# Altium PCB alarm_module.PcbDoc
Units mm, origin at the board's own origin, x right, y up, seen from the top; angles counter-clockwise.
Board outline 100 x 70 mm, 2 copper layers (Top Layer, Bottom Layer), stack 1.173 mm thick; 67 components, 56 nets, 251 pads, 98 vias.
Unrouted connection lines stored in the file: 1.
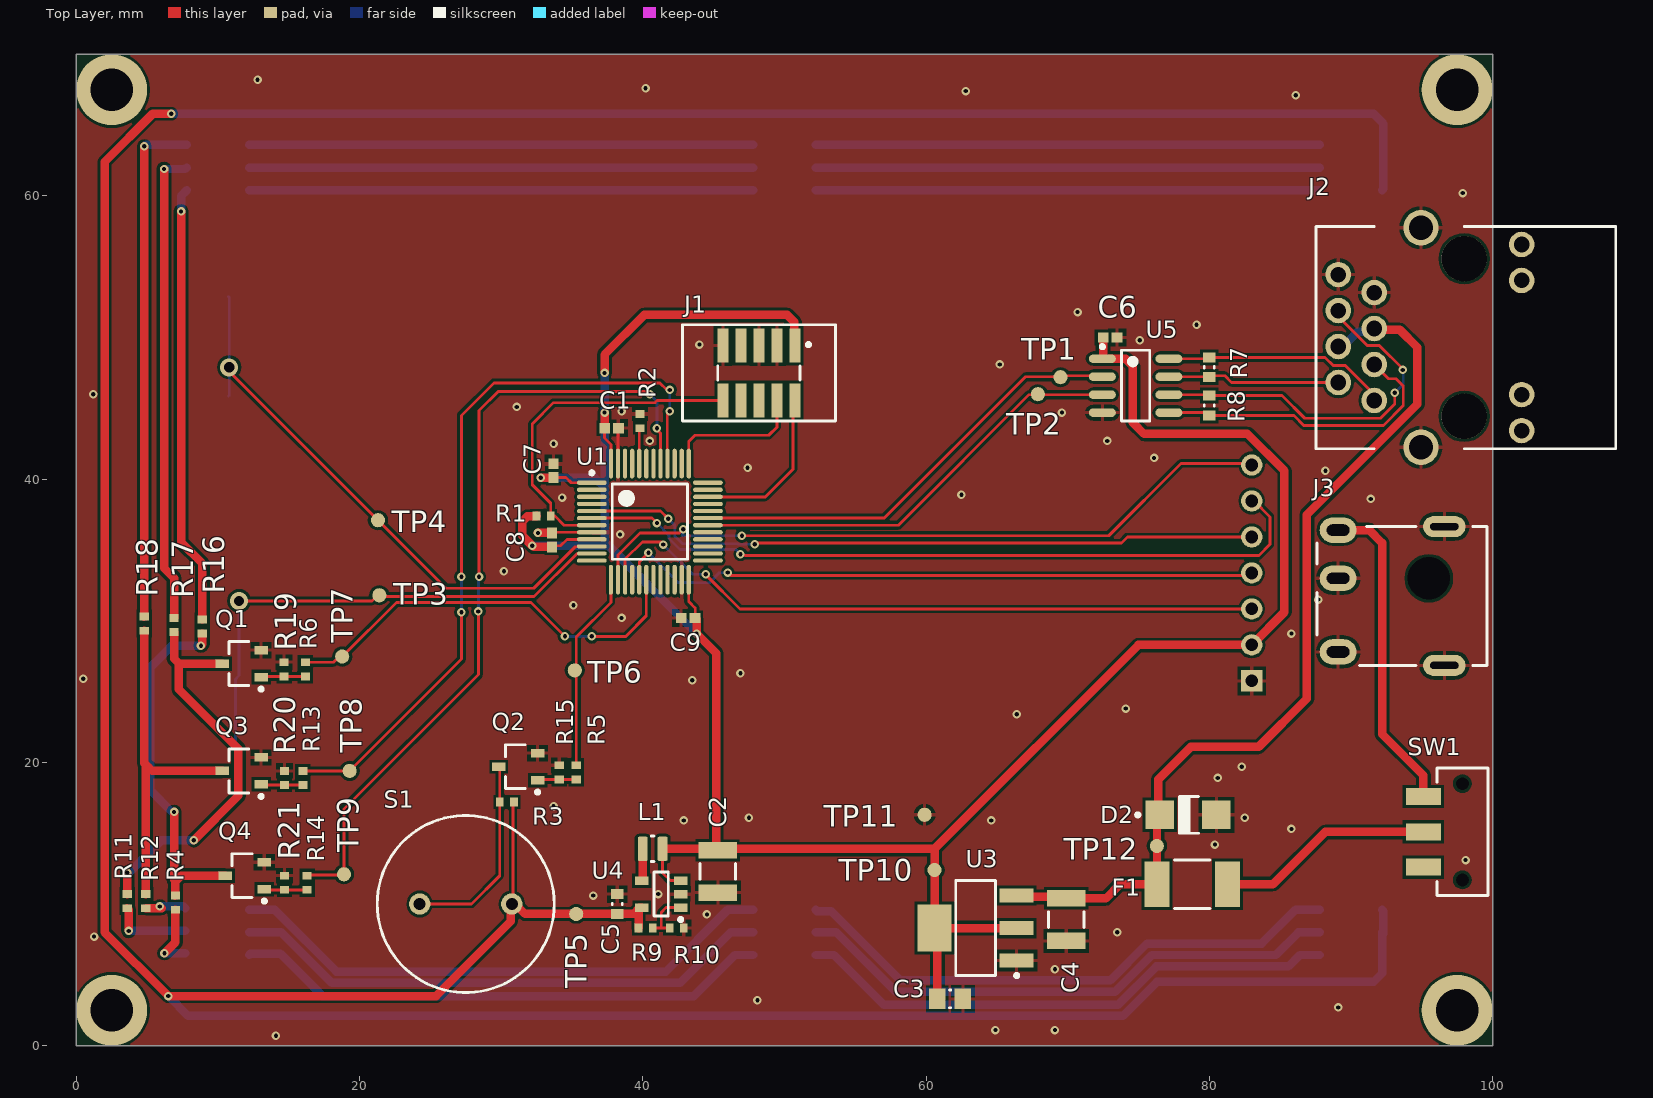
[diagram p0: Top Layer view]
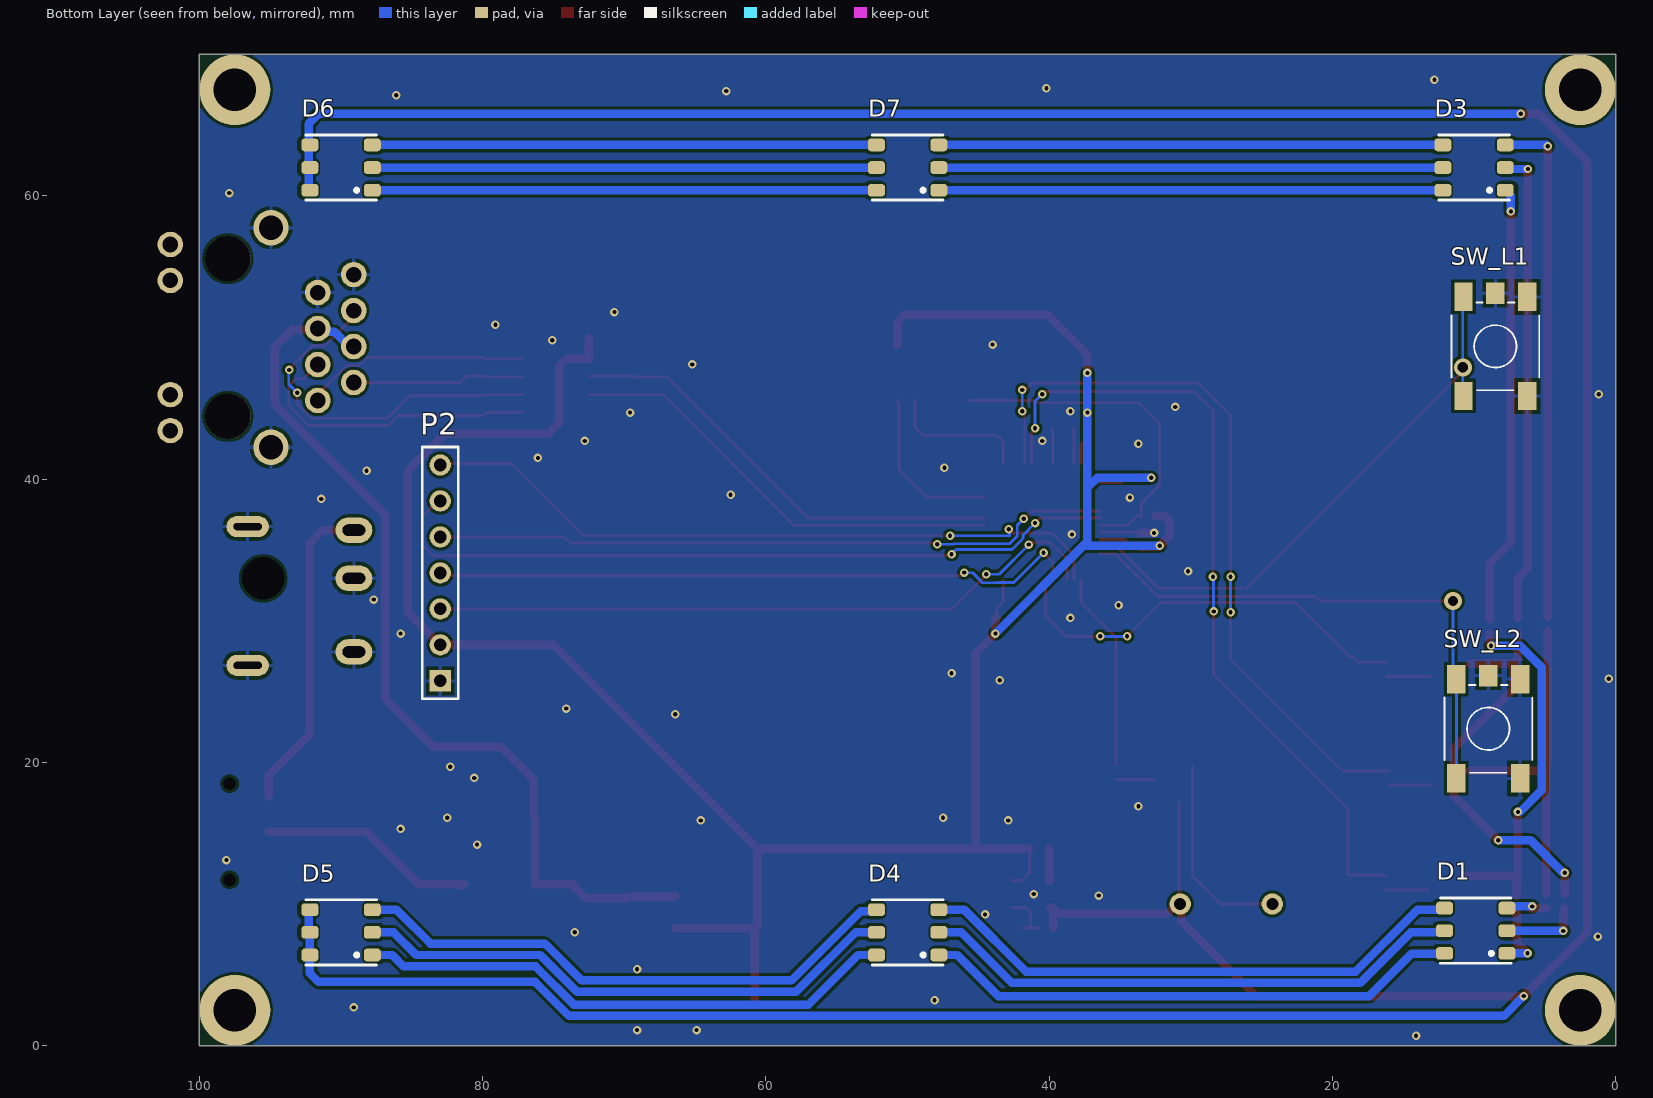
[diagram p1: Bottom Layer view, seen from below]
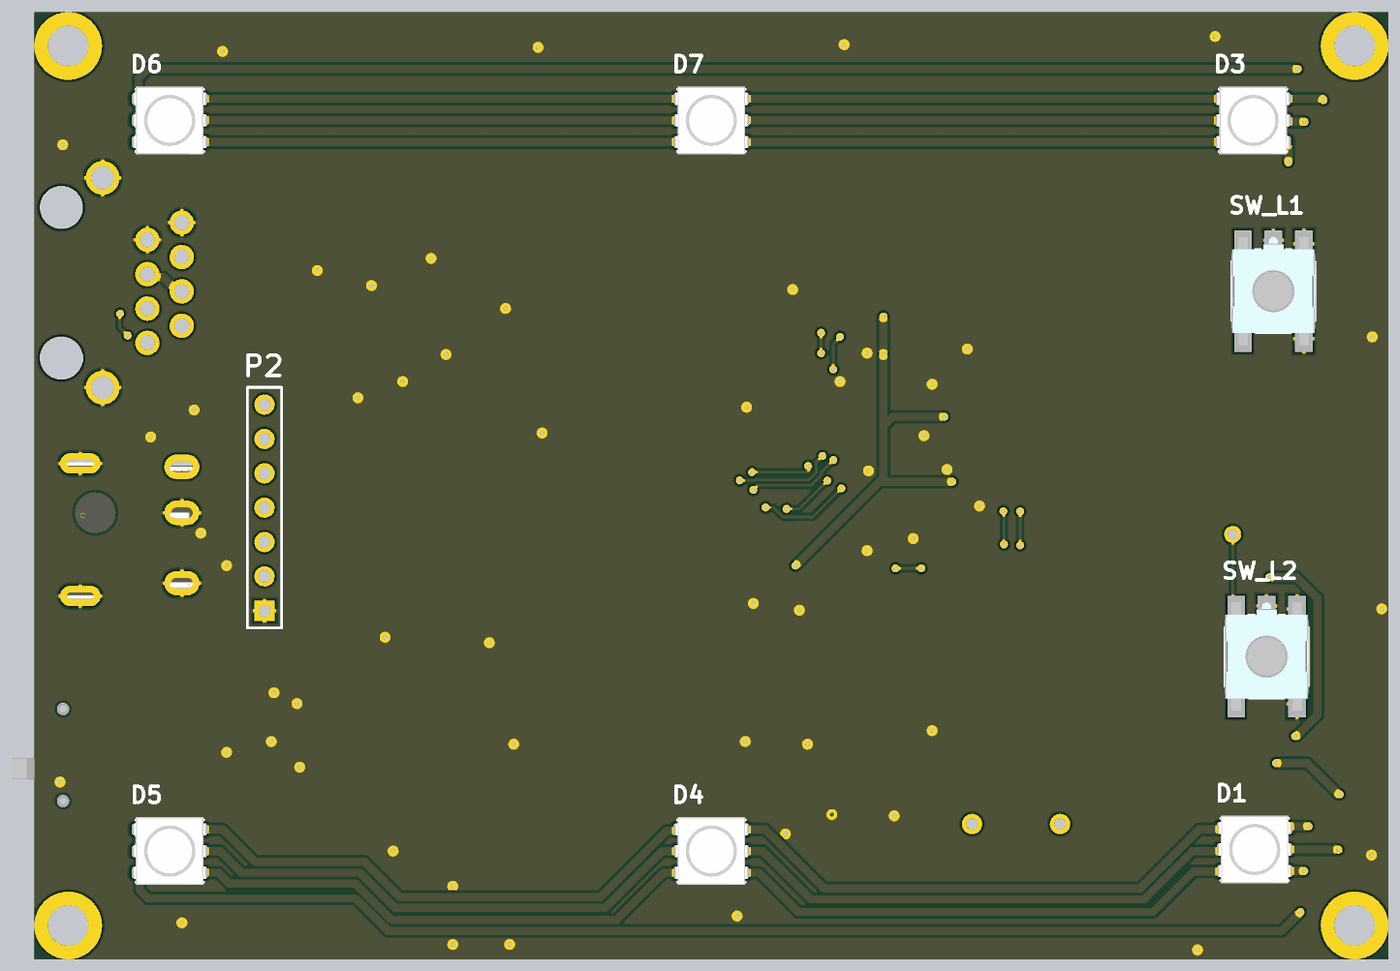
[diagram p2: 3D render of the assembled board from below, using the file's embedded part models]

## Layer stack, top to bottom
Top Solder: solder mask 0.0127, Solder Resist, Dk 3.8
Top Layer: signal copper 0.0356
Dielectric 1: dielectric 1.102, FR-4, Dk 4.8
Bottom Layer: signal copper 0.0356
Bottom Solder: solder mask 0.0127, Solder Resist, Dk 3.8

## Board outline
0,0 0,70 100,70 100,0

## Design rules (kind name [scope] priority, off if disabled: settings)
Clearance [All] p1: gap=0.2 ignorepadtopadclearanceinfootprint=FALSE
PolygonConnect [All] p1: thpad.connectstyle=Relief thpad.reliefconductorwidth=0.254 thpad.reliefentries=4 thpad.polygonreliefangle="90 Angle" thpad.airgapwidth=0.254 smdpad.connectstyle=Relief smdpad.reliefconductorwidth=0.254 smdpad.reliefentries=4 smdpad.polygonreliefangle="90 Angle" smdpad.airgapwidth=0.254 via.connectstyle=Direct via.reliefconductorwidth=0.254 via.reliefentries=4 via.polygonreliefangle="90 Angle" via.airgapwidth=0.254
RoomDefinition alarm_module [InComponentClass('alarm_module')] p1: confinementstyle=ConfineIn formatcopy=TRUE lockcomponents=FALSE outline 0,70 107,70 107,0 0,0
RoomDefinition power [InComponentClass('power')] p2: confinementstyle=ConfineIn formatcopy=TRUE lockcomponents=FALSE outline 57,32 100,32 100,-4 57,-4
RoutingVias [All] p1: holewidth=0.711 width=1.27 viastyle="Through Hole" minholewidth=0.3 minwidth=0.6 maxholewidth=0.711 maxwidth=1.27
SolderMaskExpansion SolderMaskExpansion_1 [IsVia] p1: expansion=-99 istentingtop=FALSE
SolderMaskExpansion [All] p2: expansion=0.102 istentingtop=FALSE
Width [All] p1: maxlimit=0.6 minlimit=0.2 preferedwidth=0.4
30 further rules are at their usual default settings.

## Classes and differential pairs
component class power: C3 C4 D2 F1 J3 SW1 TP10 TP11 TP12 U3
component class alarm_module: C1 C2 C5 C6 C7 C8 C9 D1 D3 D4 D5 D6 D7 J1 J2 L1 P2 Q1 Q2 Q3 Q4 R1 R2 R3 R4 R5 R6 R7 R8 R9 R10 R11 R12 R13 R14 R15 R16 R17 R18 R19 R20 R21 S1 SW_L1 SW_L2 TP1 TP2 TP3 TP4 TP5 TP6 TP7 TP8 TP9 U1 U4 U5

## Components (designator, comment, footprint, x,y, rotation, side; value= is the part's Value field where it differs from the comment)
C1 "GRM155R71C104KA88D" CAPC1005X55X25ML05T10 37.8,43.6 r180 top
C2 "CAP 10uF 50V 1210(3225)" CAPC1210(3225)190_N 45.3,12.3 r90 top value=10uF
C3 "CAP 10uF 10V 0805(2012)" CAPC0805(2012)145_N 61.7,3.3 r180 top value=10uF
C4 "CAP 10uF 50V 1210(3225)" CAPC1210(3225)190_N 69.9,8.9 r90 top value=10uF
C5 "CAP 4.7uF 10V 0603(1608)" CAPC0603(1608)55_L 38.2,10 r270 top value=4.7uF
C6 "GRM155R71C104KA88D" CAPC1005X55X25ML05T10 73,50 r180 top
C7 "GRM155R71C104KA88D" CAPC1005X55X25ML05T10 33.7,40.6 r270 top
C8 "GRM155R71C104KA88D" CAPC1005X55X25ML05T10 33.6,35.7 r270 top
C9 "GRM155R71C104KA88D" CAPC1005X55X25ML05T10 43.2,30.2 r0 top
D1 "RBG5050" 5050RGB 9.883,8.117 r0 bottom
D2 "MURA110T3G" ONSC-SMA-2-403D-02_V 78.5,16.3 r0 top
D3 "RBG5050" 5050RGB 10,62 r0 bottom
D4 "RBG5050" 5050RGB 50,8 r0 bottom
D5 "RBG5050" 5050RGB 90,8 r0 bottom
D6 "RBG5050" 5050RGB 90,62 r0 bottom
D7 "RBG5050" 5050RGB 50,62 r0 bottom
F1 "mSMD110-33V" SEAANDLAND_1812 78.8,11.4 r180 top
J1 "ARM Cortex JTAG" "1.27mm 2x5 SMD Header" 48.2,47.5 r180 top
J2 "RJ45_59_8P8C_LED" RJ45_59_8P8C_LED 98,50 r90 top
J3 "DC-044A-2.5A-2.0" DC-044A-2.5A-2.0 99.6,33 r270 top
L1 "FNR201610S2R2MT" FNR201610S 40.7,13.9 r180 top
P2 "Header 7" HDR1X7 83,25.76 r90 bottom
Q1 "AO3418" SOT95P280X125-3N 11.675,26.975 r180 top
Q2 "AO3418" SOT95P280X125-3N 31.2,19.7 r180 top
Q3 "AO3418" SOT95P280X125-3N 11.675,19.4 r180 top
Q4 "AO3418" SOT95P280X125-3N 11.9,12 r180 top
R1 "10K 5% 0402(1005)" RESC0402(1005)_N 33,37.4 r0 top value="10000.00 Ohm"
R2 "10K 5% 0402(1005)" RESC0402(1005)_N 39.8,44.1 r90 top value="10000.00 Ohm"
R3 "1K 5%" RESC0402(1005)_N 30.4,17.2 r0 top value="10000.00 Ohm"
R4 "TBD" RESC0402(1005)_N 7,10.1 r270 top value="10000.00 Ohm"
R5 "51 5%" RESC0402(1005)_N 35.3,19.3 r270 top value="10000.00 Ohm"
R6 "TBD" RESC0402(1005)_N 16.175,26.575 r270 top value="10000.00 Ohm"
R7 "120R 5% 0603(1608)" RESC0603(1608)_L 80,47.9 r90 top value="120.00 Ohm"
R8 "120R 5% 0603(1608)" RESC0603(1608)_L 80,45.2 r270 top value="120.00 Ohm"
R9 "TBD" RESC0402(1005)_N 40.2,8.3 r180 top value="10000.00 Ohm"
R10 "TBD" RESC0402(1005)_N 42.4,8.3 r180 top value="10000.00 Ohm"
R11 "TBD" RESC0402(1005)_N 3.6,10.2 r270 top value="10000.00 Ohm"
R12 "TBD" RESC0402(1005)_N 4.9,10.2 r270 top value="10000.00 Ohm"
R13 "TBD" RESC0402(1005)_N 16,18.9 r270 top value="10000.00 Ohm"
R14 "TBD" RESC0402(1005)_N 16.3,11.5 r270 top value="10000.00 Ohm"
R15 "10k 5%" RESC0402(1005)_N 34.1,19.3 r270 top value="10000.00 Ohm"
R16 "TBD" RESC0402(1005)_N 8.9,29.6 r90 top value="10000.00 Ohm"
R17 "TBD" RESC0402(1005)_N 6.9,29.7 r90 top value="10000.00 Ohm"
R18 "TBD" RESC0402(1005)_N 4.8,29.8 r90 top value="10000.00 Ohm"
R19 "10k 5%" RESC0402(1005)_N 14.675,26.575 r270 top value="10000.00 Ohm"
R20 "10k 5%" RESC0402(1005)_N 14.7,18.9 r270 top value="10000.00 Ohm"
R21 "10k 5%" RESC0402(1005)_N 14.7,11.5 r270 top value="10000.00 Ohm"
S1 "SFN-1255-0540-35P6.5" SFN-1255-0540-35P6.5 27.5,10 r180 top
SW1 "JS102011SAQN" CKCP-JS102011SAQN-3_V 96.5,15.1 r90 top
SW_L1 "431481031816" 431481031816 8.5,49.5 r270 bottom
SW_L2 "431481031816" 431481031816 9,22.5 r270 bottom
TP1 "TEST_POINT" TP-SMD-1mm 69.5,47.2 r270 top
TP2 "TEST_POINT" TP-SMD-1mm 67.9,46 r270 top
TP3 "TEST_POINT" TP-SMD-1mm 21.4,31.8 r270 top
TP4 "TEST_POINT" TP-SMD-1mm 21.3,37.1 r270 top
TP5 "TEST_POINT" TP-SMD-1mm 35.3,9.3 r270 top
TP6 "TEST_POINT" TP-SMD-1mm 35.2,26.5 r270 top
TP7 "TEST_POINT" TP-SMD-1mm 18.775,27.475 r0 top
TP8 "TEST_POINT" TP-SMD-1mm 19.3,19.4 r270 top
TP9 "TEST_POINT" TP-SMD-1mm 18.9,12.1 r270 top
TP10 "TEST_POINT" TP-SMD-1mm 60.6,12.4 r270 top
TP11 "TEST_POINT" TP-SMD-1mm 59.9,16.3 r270 top
TP12 "TEST_POINT" TP-SMD-1mm 76.3,14.1 r270 top
U1 "STM32F030C8T6" STM-LQFP48_M 40.5,37 r0 top
U3 "LD1117S33CTR" SOT-223_N 63.5,8.3 r180 top
U4 "BL8542C" SOT95P280X130-5N 41.3,10.7 r180 top
U5 "ADM3488ARZ" ADI-R-8_L 74.8,46.6 r0 top

## Footprints (in the part's own frame and the unit in brackets; to place one, negate y for a bottom-side part, rotate by r counter-clockwise, add the part's x,y. Pads: shape width x height; smd on the part's side, far side on the other; paste and mask are expansions set on the pad)
"1.27mm 2x5 SMD Header" [mm]
  rect 0.76x2.4 smd: 1(-2.54,-1.95) 2(-2.54,1.95) 3(-1.27,-1.95) 4(-1.27,1.95) 5(0,-1.95) 6(0,1.95) 7(1.27,-1.95) 8(1.27,1.95) 9(2.54,-1.95) 10(2.54,1.95)
  silkscreen extent -5.4,-3.4 5.4,3.4, body extent -3.15,-2.75 3.2,2.75, height 4.5
5050RGB [mm]
  rrect50% 1.2x0.9 smd: 1(-2.2,1.6) 2(-2.2,0) 3(-2.2,-1.6) 4(2.2,-1.6) 5(2.2,0) 6(2.2,1.6)
  silkscreen extent -2.5,-2.3 2.5,2.3, body extent -2.7,-2.5 2.7,2.5, height 1.6
431481031816 [mm] "6*6mm vertical type, SMD, height 3.1mm, black actuator, 160gf, Grounded Terminal, T&R"
  rect 2x1.3 smd: 1(3.625,-2.25) 2(-3.375,-2.25) 3(3.625,2.25) 4(-3.375,2.25)
  rect 1.5x1.3 smd: 5(-3.625,0)
  silkscreen extent -2.98,-3.1 3.22,3.1, body extent -3.88,-3.1 4.12,3.1, height 3.09
ADI-R-8_L [mm] "SOIC, 8-Leads, Body 5x4mm, Pitch 1.27mm, IPC High Density"
  oval 1.9x0.6 smd: 1(-2.35,1.905) 2(-2.35,0.635) 3(-2.35,-0.635) 4(-2.35,-1.905) 5(2.35,-1.905) 6(2.35,-0.635) 7(2.35,0.635) 8(2.35,1.905)
  silkscreen extent -2.47,-2.5 1,2.88, body extent -2,-2.5 2,2.5, height 1.75
CAPC0603(1608)55_L [mm] "Chip Capacitor, Body 1.6x0.8mm, Height 0.55mm, IPC High Density"
  rect 0.7x0.9 smd: 1(-0.7,0) 2(0.7,0)
  silkscreen extent -0.05,-0.35 0.05,0.35, body extent -0.87,-0.47 0.88,0.48, height 0.55
CAPC0805(2012)145_N [mm] "Chip Capacitor, Body 2.0x1.2mm, Height 1.45mm, IPC Medium Density"
  rect 1.15x1.45 smd: 1(-0.9,0) 2(0.9,0)
  silkscreen extent -0.05,-0.62 0.05,0.63, body extent -1.1,-0.72 1.1,0.73, height 1.45
CAPC1005X55X25ML05T10 [mm] "Chip Capacitor, 2-Leads, Body 1.00x0.50mm, IPC Low Density"
  rect 0.76x0.72 smd: 1(-0.49,0) 2(0.49,0)
  body extent -0.53,-0.28 0.53,0.27, height 0.55
CAPC1210(3225)190_N [mm] "Chip Capacitor, Body 3.2x2.5mm, Height 1.9mm, IPC Medium Density"
  rect 1.15x2.7 smd: 1(-1.5,0) 2(1.5,0)
  silkscreen extent -0.55,-1.25 0.55,1.25, body extent -1.7,-1.35 1.7,1.35, height 1.9
CKCP-JS102011SAQN-3_V [mm] "SMD, 3-Leads, Body 9x3.6mm, Pitch 2.5mm"
  rect 1.2x2.5 smd: 1(-2.5,1.375) 2(0,1.375) 3(2.5,1.375)
  round 0.6 hole 0.9 unplated: MH1(-3.4,-1.375) MH2(3.4,-1.375)
  silkscreen extent -4.5,-3.17 4.5,0.43, body extent -4.5,-5.18 4.5,2.37, height 3.52
DC-044A-2.5A-2.0 [mm] "DC Jack, 6mm OD, 2mm ID"
  rrect100% 1.8x2.6 hole 0.8 slot 1.6 at 90 deg: 1(-3.4,-10.5) 2(5.2,-10.5) 3(0,-10.5)
  rrect100% 1.5x3 hole 0.5 slot 2 at 90 deg: 4(-3.65,-3) 5(6.15,-3)
  rrect100% 2x2 hole 3 unplated: MNT(0,-4.1)
  silkscreen extent -3.65,-12 6.15,0, body extent -3.75,-11.75 6.35,0, height 7.3
FNR201610S [mm] "Wire Wound SMD Power Inductors 2.0×1.6×1.0"
  rrect25% 0.7x1.7 smd paste+0: 1(-0.7,0) 2(0.7,0)
  silkscreen extent -0.1,-0.9 0.1,0.9, body extent -1,-0.8 1,0.8, height 0.95
HDR1X7 [mm] "Connector; Header; 7 Position"
  rect 1.5x1.5 hole 0.9: 1(0,0)
  round 1.5 hole 0.9: 2(2.54,0) 3(5.08,0) 4(7.62,0) 5(10.16,0) 6(12.7,0) 7(15.24,0)
  silkscreen extent -1.27,-1.27 16.51,1.27
ONSC-SMA-2-403D-02_V [mm] "Molded, 2-Leads, Body 4.57x2.92mm"
  rect 2x2 smd: 1(-2,0) 2(2,0)
  silkscreen extent -3.67,-1.3 0.74,1.3, body extent -2.16,-1.3 2.16,1.3, height 2.2
RESC0402(1005)_N [mm] "Chip Resistor, Body 1.0x0.5mm, IPC Medium Density"
  rect 0.55x0.65 smd: 1(-0.5,0) 2(0.5,0)
  body extent -0.52,-0.27 0.53,0.28, height 0.4
RESC0603(1608)_L [mm] "Chip Resistor, Body 1.6x0.8mm, IPC High Density"
  rect 0.7x0.9 smd: 1(-0.7,0) 2(0.7,0)
  silkscreen extent -0.05,-0.35 0.05,0.35, body extent -0.85,-0.47 0.85,0.47, height 0.6
RJ45_59_8P8C_LED [mm] "Generic RJ49 jack with LED and without magnetics"
  round 1.8 hole 1.1: 1(-4.445,6.35) 2(-3.175,8.89) 3(-1.905,6.35) 4(-0.635,8.89) 5(0.635,6.35) 6(1.905,8.89) 7(3.175,6.35) 8(4.445,8.89) 9(-6.57,-4.06) 10(-4.03,-4.06) 11(4.03,-4.06) 12(6.57,-4.06)
  round 3.2 hole 3.2 unplated: POS1(-5.565,0) POS2(5.565,0)
  round 2.5 hole 1.7: S1(-7.75,3.05) S2(7.75,3.05)
  silkscreen extent -7.85,-10.7 7.85,10.46, body extent -7.85,-10.58 7.85,10.58, height 13.45
SEAANDLAND_1812 [mm] "Surface Mount Fuses 1812"
  rrect0% 1.78x3.2 smd paste+0: 1(-2.49,0) 2(2.49,0)
  silkscreen extent -1.25,-1.71 1.25,1.71, body extent 0,-0.25 0.2,0, height 2
SFN-1255-0540-35P6.5 [mm] "Piezo Buzzer, 4KHz"
  round 1.5 hole 0.85: 1(-3.25,0) 2(3.25,0)
  silkscreen extent -6.25,-6.25 6.25,6.25, body extent -6.25,-6.25 6.25,6.25, height 5.5
SOT95P280X125-3N [mm] "SOT23, 3-Leads, Body 2.95x2.80mm, Pitch 0.95mm, IPC Medium Density"
  rect 0.95x0.6 smd: 1(-1.375,0.95) 2(-1.375,-0.95) 3(1.375,0)
  silkscreen extent -1.5,-1.55 0.9,1.92, body extent -1.5,-1.55 1.5,1.55, height 1.25
SOT95P280X130-5N [mm] "SOT23, 5-Leads, Body 2.90x2.80mm, Pitch 0.95mm, IPC Medium Density"
  rect 0.95x0.6 smd: 1(-1.375,0.95) 2(-1.375,0) 3(-1.375,-0.95) 4(1.375,-0.95) 5(1.375,0.95)
  silkscreen extent -1.5,-1.55 0.5,1.92, body extent -1.5,-1.55 1.5,1.55, height 1.3
SOT-223_N [mm] "SOT223, 4-Leads, Body 6.5x3.5mm, Pitch 2.3mm, Lead Span 7mm, IPC Medium Density"
  rect 2.4x1 smd: 1(-2.9,2.3) 2(-2.9,0) 3(-2.9,-2.3)
  rect 2.4x3.3 smd: 4(2.9,0)
  silkscreen extent -3.03,-3.35 1.4,3.47, body extent -1.85,-3.35 1.85,3.35, height 1.8
STM-LQFP48_M [mm] "QFP, 48-Leads, Body 7x7mm, Pitch 0.5mm, IPC Low Density"
  oval 2.1x0.3 smd: 1(-4.1,2.75) 2(-4.1,2.25) 3(-4.1,1.75) 4(-4.1,1.25) 5(-4.1,0.75) 6(-4.1,0.25) 7(-4.1,-0.25) 8(-4.1,-0.75) 9(-4.1,-1.25) 10(-4.1,-1.75) 11(-4.1,-2.25) 12(-4.1,-2.75) 25(4.1,-2.75) 26(4.1,-2.25) 27(4.1,-1.75) 28(4.1,-1.25) 29(4.1,-0.75) 30(4.1,-0.25) 31(4.1,0.25) 32(4.1,0.75) 33(4.1,1.25) 34(4.1,1.75) 35(4.1,2.25) 36(4.1,2.75)
  oval 0.3x2.1 smd: 13(-2.75,-4.1) 14(-2.25,-4.1) 15(-1.75,-4.1) 16(-1.25,-4.1) 17(-0.75,-4.1) 18(-0.25,-4.1) 19(0.25,-4.1) 20(0.75,-4.1) 21(1.25,-4.1) 22(1.75,-4.1) 23(2.25,-4.1) 24(2.75,-4.1) 37(2.75,4.1) 38(2.25,4.1) 39(1.75,4.1) 40(1.25,4.1) 41(0.75,4.1) 42(0.25,4.1) 43(-0.25,4.1) 44(-0.75,4.1) 45(-1.25,4.1) 46(-1.75,4.1) 47(-2.25,4.1) 48(-2.75,4.1)
  silkscreen extent -4.22,-2.65 2.65,3.57, body extent -3.5,-3.5 3.5,3.5, height 1.6
TP-SMD-1mm [mm] "Test point, round, 1mm, SMD"
  round 1 smd paste-999: 1(0,0)

## Part data
C1 C6 C7 C8 C9: library part CMP-2100-03641-1, "Chip Capacitor, 0.1 uF, +/- 10%, 16 V, -55 to 125 degC, 0402 (1005 Metric), RoHS, Tape and Reel", Capacitance=100nF, Case Code (Imperial)=0402, Case Code (Metric)=1005, Dielectric=X7R, Dielectric Material=Ceramic, Insulation Resistance=10GR, Manufacturer=Murata, Max Operating Temperature=125degC, Min Operating Temperature=-55degC, Package Description="2-Pin Surface Mount Device, Body 1 x 0.5 mm", Package Quantity=1, Tolerance=10%, Voltage=16V, Case/Package=0402, Datasheet URL=http://psearch.en.murata.com/capacitor/product/GRM155R71C104KA88%23.pdf, Datasheet Version=42675.0, Depth=0.5mm, Height=0.5mm, Lead Free=LeadFree, Length=1mm, Manufacturer URL=http://www.murata.com/, Material=Ceramic, Mount=SurfaceMount, Number of Pins=2, Package Reference=0402, Packaging=TapeandReel, Radiation Hardening=No, REACH SVHC=NoSVHC, RoHSCompliant=true, Termination=SMD/SMT, Thickness=0.022inch, Voltage Rating=16V, Voltage Rating (DC)=16V, Width=0.5mm
C2 C4: library part CMP-1038-02238-1, "CAP 10uF 50V -20% to +80% 1210 (3225 Metric) Thickness 1.9mm SMD", Case-EIA=1210, Case-Metric=3225, Rated Voltage="50 V", Tolerance="-20% to +80%", Max Thickness="1.9 mm", Technology=SMT
C3: library part CMP-1036-04922-1, "CAP 10uF 10V ±10% 0805 (2012 Metric) Thickness 1.45mm SMD", Case-EIA=0805, Case-Metric=2012, Rated Voltage="10 V", Tolerance=Â±10%, Max Thickness="1.45 mm", Technology=SMT
C5: library part CMP-1035-02784-1, "CAP 4.7uF 10V ±10% 0603 (1608 Metric) Thickness 0.55mm SMD", Case-EIA=0603, Case-Metric=1608, Rated Voltage="10 V", Tolerance=Â±10%, Max Thickness="0.55 mm", Technology=SMT
D1 D3 D4 D5 D6 D7: "Generic RGB LED in 5050 package. Note that several variants exist, so check the pinout!", Manufacturer=Unknown/Generic, PartNumber=Unknown/Generic
D2: library part CMP-0902-00293-1, "Surface Mount Ultrafast Power Rectifier, 2-Pin SMA, Pb-Free, Tape and Reel", Manufacturer="On Semiconductor", ComponentLink1Description="Manufacturer URL", ComponentLink1URL=http://www.onsemi.com/, ComponentLink2Description=Datasheet, ComponentLink2URL=http://www.onsemi.cn/pub_link/Collateral/MURA105T3-D.PDF, ComponentLink3Description="Package Specification", ComponentLink3URL=http://www.onsemi.com/pub_link/Collateral/403D-02.PDF, DatasheetVersion="Rev. 5", IFSM Max (A)=50, Mounting Technology="Surface Mount", PackageDescription="2-Pin Small Molded Package, J-Bend Lead, Body 2.605 x 4.315 mm", PackageReference=SMA-2-403D-02, PackageVersion="Rev. G, 07/2012", Packing="Tape and Reel", PartNumber=MURA110T3G, RoHS=TRUE, Type=Ultrafast
F1: "Surface Mount Fuses 33V 100A 1.1A 2.2A 1812 RoHS", Manufacturer="Sea & Land Electronic Corp", ComponentLink2Description=Datasheet, ComponentLink2URL="nSMD020-30V 0-2A-30V-Self-healing-fuse_C69680.pdf", PartNumber=mSMD110-33V
J1: "Arm Cortex 10-pin JTAG connector", Manufacturer=Unknown/Generic, PartNumber=unknown/Generic
J2: "Generic RJ49 jack with LED and without magnetics", Manufacturer=Unknown/Generic, PartNumber=RJ45_59_8P8C_LED
J3: "DC Jack, 6mm OD, 2mm ID", Manufacturer=XKB, PartNumber=DC-044A-2.5A-2.0
L1: "Wire Wound SMD Power Inductors 2.0×1.6×1.0 2.2uH"
P2: "Header, 7-Pin", LatestRevisionDate=17-Jul-2002, LatestRevisionNote="Re-released for DXP Platform.", Publisher="Altium Limited"
Q1 Q2 Q3 Q4: "30V N-Channel MOSFET", Manufacturer="Alpha & Omega", ComponentLink1Description=datasheet, ComponentLink1URL=ao3418.pdf, PartNumber=AO3418
R1 R2 R3 R4 R5 R6 R9 R10 R11 R12 R13 R14 R15 R16 R17 R18 R19 R20 R21: library part CMP-1011-00098-1, "10K 0.063W 5% 0402 (1005 Metric)  SMD", Case-EIA=0402, Case-Metric=1005, Power="0.063 W", Tolerance="5 %", Technology=SMT
R7 R8: library part CMP-1012-00052-1, "120R 0.1W 5% 0603 (1608 Metric)  SMD", Case-EIA=0603, Case-Metric=1608, Power="0.1 W", Tolerance="5 %", Technology=SMT
S1: "Piezo Buzzer, 4KHz", Manufacturer=S&S, PartNumber=SFN-1255-0540-35P6.5
SW1: library part CMP-2000-06501-1, "Sub-Miniature Slide Switch, SPDT, -40 to 85 degC, 3-Pin SMD, RoHS, Tape and Reel", Actuator Color=Black, Contact Rating @ Voltage=0.3@6VDCA, Dielectric Strength=500VAC, Manufacturer="C&K Components", Maximum AC Voltage Rating=N/A, Maximum Contact Resistance=70mOhm, Maximum DC Voltage Rating=6V, Minimum Insulation Resistance=100MOhm, Operating Temperature=-40to85C, Package Description="3-Pin Surface Mount Device, Body 9 x 3.6 mm, Height 3.5 mm", Package Reference=SMT, Actuator Material=Nylon4/6, Actuator Style=SideSlide, Base Material=N/A, Body Orientation=RightAngle, Contact Material=CopperAlloy, Contact Plating=Silver, COO=US, Datasheet URL=https://datasheet.ciiva.com/1532/js-9dec14-1532400.pdf, Datasheet Version=12/2014, Dimension=9x4.3mm, ECCN=EAR99, Electrical Life=15000Cycles, Family=JS, Housing Material=Nylon4/6, HTS=8536509050, Manufacturer URL=http://www.ckswitches.com/, Mechanical Life=N/A, Mounting=SurfaceMount,GullWing, Mounting Technology=SurfaceMount, Packaging=TapeandReel, Part No=JS102011SAQN, Pole Throw Configuration=SPDT, Product Weight=N/A, RoHS=Yes, Seal Description=N/A, Seal Location=N/A, Supplier=C&KComponents, Switch Configuration=N/A, Type=Sub-Miniature
SW_L1 SW_L2: library part CMP-1457-00011-1, "WS-TASV SMD Tact Switch 6X6 mm with ground terminal", Manufacturer="Wuerth Elektronik", ComponentLink1Description="Manufacturer URL", ComponentLink1URL=http://www.we-online.com, ComponentLink2Description=Datasheet, ComponentLink2URL=http://katalog.we-online.de/em/datasheet/431481031816.pdf, NoPins=04, PackageReference=431481031816, PartNumber=431481031816
TP1 TP2 TP3 TP4 TP5 TP6 TP7 TP8 TP9 TP10 TP11 TP12: "Test point"
U1: library part CMP-0304-00024-2, "ARM Cortex-M0 32-bit MCU, 64 KB Flash, 8 KB Internal RAM, 39 I/Os, 48-pin LQFP, -40 to 85 degC, Tray", I/Os (High Current)=39, Operating Frequency(F) (Processor speed) (MHz)=48, Supply Voltage(Vcc) min (V)=2.4, ComponentLink1Description="Manufacturer URL", ComponentLink1URL=http://www.st.com/web/en/home.html, ComponentLink2Description=Datasheet, ComponentLink2URL=http://www.st.com/st-web-ui/static/active/en/resource/technical/document/datasheet/DM00088500.pdf, ComponentLink3Description="Package Specification", ComponentLink3URL=http://www.st.com/st-web-ui/static/active/en/resource/technical/document/datasheet/DM00058181.pdf, Core="ARM Cortex-M0", DatasheetVersion="Rev. 1", FLASH Size (Prog) (kB)=64, Internal RAM Size (kB)=8, Mounting Technology="Surface Mount", PackageDescription="48-Pin Low Profile Quad Flat Package, 7 x 7 mm Body, 0.5 mm Pitch", PackageReference=LQFP48, PackageVersion="Rev. 6, 06/2013", Packing=Tray, PartNumber=STM32F030C8T6
U3: library part CMP-0244-00307-1, "Fixed Low Drop Positive Voltage Regulator, 3.3V, 4-Pin SOT-223, Tape and Reel", ComponentLink1Description="Manufacturer URL", ComponentLink1URL=http://www.st.com, ComponentLink2Description=Datasheet, ComponentLink2URL=http://www.st.com/internet/com/TECHNICAL_RESOURCES/TECHNICAL_LITERATURE/DATASHEET/CD00000544.pdf, DatasheetVersion=1/11/2011, PackageDescription="4-Pin SOT-223 Package, 6.5 x 3.5 mm Body, 2.3 mm Pitch, 7 mm Lead Span", PackageReference=SOT-223, PackageVersion=2010
U4: "0.85V startup, 1MHz, 300mA Iout,  Synchronous Boost Converter (adjustable output)", Manufacturer=Belling, PartNumber=BL8542C
U5: library part CMP-0535-00058-1, "3.3 V Slew Rate Limited, Full-Duplex, RS-485/RS-422 Transceivers, 3 to 3.6 V, -40 to 85 degC, 8-Pin SOIC (R-8), RoHS, Tube", Manufacturer="Analog Devices", Supply Voltage="3 to 3.6 V", Temperature Range="-40 to 85 degC", ComponentLink1Description="Manufacturer URL", ComponentLink1URL=http://www.analog.com/en/index.html, ComponentLink2Description=Datasheet, ComponentLink2URL=http://www.analog.com/static/imported-files/data_sheets/ADM3483_3485_3488_3490_3491.pdf, ComponentLink3Description="Package Specification", ComponentLink3URL=http://www.analog.com/media/en/package-pcb-resources/package/pkg_pdf/soic_narrow-r/r_8.pdf, DatasheetVersion="Rev. E", Duplex=Full, Guaranteed Data Rate="0.25 Mbps", Mounting Technology="Surface Mount", Number of Drivers=1, PackageDescription="8-Pin Standard Small Outline Package, Body 4.9 x 3.9 mm, Pitch 1.27 mm", PackageVersion=06/2006, Packing=Tube, PartNumber=ADM3488ARZ, Receiver Hysteresis="50 mV", RoHS=TRUE

## Free pads (board coordinates)
  round 5 hole 3 unplated: MP1(2.5,2.5) MP2(2.5,67.5) MP3(97.5,67.5) MP4(97.5,2.5)

## Via types
v1: diameter 0.6, hole 0.3, Top Layer to Bottom Layer, 96 vias
v2: diameter 1.27, hole 0.711, Top Layer to Bottom Layer, 2 vias

## Nets (pads, with @x,y where several pads share a name; then routed paths per layer and width w, separated by ;. In a path a pad name is that pad's centre, name@x,y a point inside that pad or via, vN(x,y) a via of type N, cw(c..) or ccw(c..) an arc to the next point about the centre after c; other vN are vias at no path point)
+3.3V: C1.2 C2.2 C3.2 C6.2 C7.2 C8.2 C9.2 J1.1 L1.1 P2.2 R1.1 TP10.1 U1.1 U1.9 U1.24 U1.48 U3.2 U3.4 U4.3 U5.1 | length 184.5
  Top Layer w0.2: C8.2 33.69,35.3 34.2,35.3 34.65,35.75 U1.9 ; C7.2 34.59,40.11 34.95,39.75 U1.1 ; C1.2 37.3,43.59 37.3,42.9 37.75,42.45 U1.48 ; L1.1 41.4,12.2 41.95,11.65 U4.3 ; U1.24 43.25,31.35 43.7,30.9 43.7,30.21 C9.2
  Top Layer w0.6: R1.1 32.475,37.375 31.851,37.375 31.5,37.024 31.5,36 v1(32.2,35.3) 32.29,35.21 C8.2 ; v1(32.8,40.1) 33.69,40.1 C7.2 ; v1(37.3,44.7) 37.3,43.61 C1.2 ; v1(37.3,47.5) 37.3,48.8 40.1,51.6 50.2,51.6 50.7,51.1 50.7,49.49 J1.1 ; L1.1 C2.2@45.2,13.9 ; C9.2 43.71,30.2 43.77,30.14 43.77,30.12 43.8,30.09 v1(43.8,29.1) 45.2,27.7 C2.2@45.2,13.9 ; C3.2 60.8,8.1 U3.4 ; U3.2 U3.4 ; U5.1 U5.1@72.51,48.505 ; C6.2 U5.1@72.51,48.505 ; C2.2@45.2,13.9 60.6,13.9 ; U3.4 TP10.1 60.6,13.9 ; 60.6,13.9 75,28.3 P2.2 85.3,30.6 85.3,40.6 82.7,43.2 75.4,43.2 74.6,44 74.6,48 74.095,48.505 U5.1@72.51,48.505
  Bottom Layer w0.6: v1(32.2,35.3) 37.6,35.3 ; v1(32.8,40.1) 36.6,40.1 37.3,39.4 ; v1(37.3,47.5) v1(37.3,44.7) 37.3,39.4 ; v1(43.8,29.1) 37.6,35.3 ; 37.3,39.4 37.3,35.6 37.6,35.3
+12V: C4.2 D2.1 F1.2 J2.4 J2.5 TP12.1 U3.3 | length 65.4
  Top Layer w0.6: U3.3 66.5,10.5 69.8,10.5 C4.2 72.698,10.4 73.698,11.4 F1.2 76.31,14.1 76.31,16.11 76.4,16.2 76.4,18.8 78.7,21.1 83.5,21.1 86.9,24.5 86.9,37.5 94.7,45.3 94.7,49.3 93.45,50.55 91.735,50.55 J2.5
  Bottom Layer w0.6: J2.4 89.435,49.365 90.475,50.405 91.42,50.405 J2.5
+12V_IN: F1.1 SW1.2 | length 15.5
  Top Layer w0.6: F1.1@81.41,11.28 F1.1 84.5,11.4 88.2,15.1 SW1.2
\R\S\T: J1.10 R1.2 U1.7 | length 24.4
  Top Layer w0.2: U1.7 34.45,36.75 33.8,37.4 R1.2 33.5,38.3 32.2,39.6 32.2,43.9 33.7,45.4 40.866,45.4 41.016,45.55 J1.10
BOOT0: R2.1 U1.44 | length 2.5
  Top Layer w0.2: U1.44 39.75,43.55 R2.1
BUT_CAL: SW_L1.1 SW_L1.2 TP4.1 U1.10 | length 40.5
  Top Layer w0.2: v2(10.8,47.9) 10.8,47.6 TP4.1 26.1,32.3 32.3,32.3 35.231,35.231 36.381,35.231 U1.10
  Bottom Layer w0.2: SW_L1.1 10.8,45.925 v2(10.8,47.9) 10.8,52.825 SW_L1.2
BUT_SELECT: SW_L2.1 SW_L2.2 TP3.1 U1.11 | length 38.9
  Top Layer w0.2: v2(11.5,31.4) 20.883,31.4 21.2,31.717 32.331,31.717 35.344,34.731 36.381,34.731 U1.11
  Bottom Layer w0.2: SW_L2.1 SW_L2.2 11.5,26.125 v2(11.5,31.4)
DRIVE_B: Q4.3 R4.1 R16.1 | length 25.7
  Top Layer w0.6: v1(6.9,16.5) 6.9,11.7 7,11.6 ; R4.1 7,11.6 ; v1(8.8,28.238) 8.9,28.338 R16.1 ; Q4.3 7.4,12 7,11.6
  Bottom Layer w0.6: v1(6.9,16.5) 6.768,16.5 5.238,18.03 5.238,26.72 6.756,28.238 v1(8.8,28.238)
DRIVE_G: Q3.3 R12.1 R18.1 | length 24.2
  Top Layer w0.6: R18.1 4.8,19.951 5.1,19.651 5.351,19.4 Q3.3 ; R12.1 4.9,19.851
DRIVE_R: Q1.3 R11.1 R17.1 | length 28.1
  Top Layer w0.6: R11.1 v1(3.6,12.2) ; R17.1 6.9,27.326 7.251,26.975 ; v1(8.3,14.5) 11.451,17.651 11.451,20.949 7.251,25.149 7.251,26.975 ; Q1.3 7.251,26.975
  Bottom Layer w0.6: v1(3.6,12.2) 3.7,12.2 6,14.5 v1(8.3,14.5)
GND: C1.1 C2.1 C3.1 C4.1 C5.1 C6.1 C7.1 C8.1 C9.1 D2.2 J1.3 J1.5 J1.9 J2.7 J2.8 J2.S1 J2.S2 J3.2 J3.3 J3.4 J3.5 P2.1 Q1.2 Q2.2 Q3.2 Q4.2 R2.2 R10.1 R15.1 R19.1 R20.1 R21.1 SW_L1.3 SW_L1.4 SW_L1.5 SW_L2.3 SW_L2.4 SW_L2.5 TP11.1 U1.8 U1.23 U1.47 U3.1 U4.2 U5.4 | length 6.3
  Top Layer w0.2: C8.1 33.66,36.25 U1.8 ; U1.47 38.25,43.56 C1.1
  Top Layer w0.6: v1(32.6,36.2) 33.59,36.2 C8.1
  other v1: 14.1,0.7 64.9,1.1 69.1,1.1 89.1,2.7 48.1,3.2 69.1,5.4 1.257,7.703 73.5,8 44.534,9.266 36.5,10.6 41.1,10.7 98.1,13.1 80.4,14.2 85.8,15.3 42.9,15.9 64.6,15.9 47.5,16.1 82.5,16.1 33.7,16.9 80.6,18.9 82.3,19.7 66.4,23.4 74.1,23.8 43.5,25.8 0.5,25.9 46.9,26.3 85.8,29.1 38.5,30.2 35.1,31.1 87.7,31.5 96.4,32.8 30.2,33.5 38.4,36.1 91.4,38.6 34.3,38.7 62.5,38.9 88.2,40.6 47.4,40.8 76.1,41.5 33.7,42.5 40.5,42.7 72.8,42.7 69.6,44.7 38.5,44.8 31.1,45.1 1.2,46 65.2,48.1 44,49.5 75.1,49.8 79.1,50.9 70.7,51.8 97.9,60.2 86.1,67.1 62.8,67.4 40.2,67.6 12.8,68.2
LED_B: R14.1 TP9.1 U1.41 | length 57.3
  Top Layer w0.2: R14.1 16.35,12.05 18.85,12.05 TP9.1 18.9,16.708 28.4,26.208 28.4,30.654 v1(28.392,30.662) ; v1(28.436,33.108) 28.436,44.836 29.8,46.2 40.3,46.2 v1(40.5,46) ; v1(41,43.6) 41,43.492 41.25,43.242 U1.41
  Bottom Layer w0.2: v1(28.392,30.662) 28.4,30.671 28.4,33.1 28.408,33.108 v1(28.436,33.108) ; v1(40.5,46) 41,45.5 v1(41,43.6)
LED_G: R13.1 TP8.1 U1.40 | length 52.8
  Top Layer w0.2: R13.1 TP8.1 27.2,27.3 27.2,29.3 v1(27.2,30.6) ; v1(27.2,33.1) 27.2,44.5 29.5,46.8 41.2,46.8 41.7,46.3 v1(41.9,46.3) ; U1.40 41.731,41.119 41.731,44.631 v1(41.9,44.8)
  Bottom Layer w0.2: v1(27.2,30.6) v1(27.2,33.1) ; v1(41.9,44.8) v1(41.9,46.3)
LED_R: R6.1 TP7.1 U1.18 | length 30
  Top Layer w0.2: R6.1 18.159,27.075 18.559,27.475 TP7.1 22.6,31.3 32.1,31.3 v1(34.5,28.9) ; v1(36.4,28.9) 38.8,28.9 40.25,30.35 U1.18
  Bottom Layer w0.2: v1(34.5,28.9) v1(36.4,28.9)
NetD1_1: D1.1 R4.2 | length 4.9
  Top Layer w0.6: v1(6.222,6.527) 6.222,6.522 7,7.3 R4.2
  Bottom Layer w0.6: v1(6.222,6.527) 7.673,6.527 D1.1
NetD1_2: D1.2 R11.2 | length 5.6
  Top Layer w0.6: R11.2 3.625,9.675 3.7,9.6 v1(3.7,8.1)
  Bottom Layer w0.6: v1(3.7,8.1) 3.717,8.117 D1.2
NetD1_3: D1.3 R12.2 | length 3
  Top Layer w0.6: R12.2 6,9.7 v1@6.017,9.717
  Bottom Layer w0.6: v1(5.9,9.833) 7.567,9.833 D1.3
NetD1_4: D1.4 D4.3 | length 39.2
  Bottom Layer w0.6: D1.4@12.2,9.6 14,9.6 18.366,5.234 41.634,5.234 46,9.6 D4.3
NetD1_5: D1.5 D4.2 | length 38.6
  Bottom Layer w0.6: D1.5@12.2,8 14.469,8 18.034,4.434 42.634,4.434 46.2,8 D4.2
NetD1_6: D1.6 D4.1 | length 38.1
  Bottom Layer w0.6: D1.6@12.2,6.4 12.3,6.5 14.4,6.5 17.4,3.5 43.6,3.5 46.5,6.4 D4.1
NetD3_1: D3.1 R16.2 | length 31.1
  Top Layer w0.6: v1(7.4,58.9) 7.4,35.547 8.9,34.047 R16.2
  Bottom Layer w0.6: v1(7.4,58.9) 7.4,60 D3.1
NetD3_2: D3.2 R17.2 | length 33.6
  Top Layer w0.6: v1(6.2,61.9) 6.2,33.719 6.9,33.019 R17.2
  Bottom Layer w0.6: v1(6.2,61.9) 7.7,61.9 D3.2
NetD3_3: D3.3 R18.2 | length 36.2
  Top Layer w0.6: R18.2 v1(4.8,63.5)
  Bottom Layer w0.6: v1(4.8,63.5) 4.9,63.6 D3.3
NetD3_4: D3.4 D7.3 | length 35.6
  Bottom Layer w0.6: D3.4 D7.3
NetD3_5: D3.5 D7.2 | length 35.6
  Bottom Layer w0.6: D3.5 D7.2
NetD3_6: D3.6 D7.1 | length 35.6
  Bottom Layer w0.6: D3.6 D7.1
NetD4_4: D4.4 D5.3 | length 39.7
  Bottom Layer w0.6: D4.4 52.3,9.5 53.3,9.5 58.2,4.6 73.006,4.6 75.606,7.2 83.7,7.2 86.1,9.6 D5.3
NetD4_5: D4.5 D5.2 | length 39.1
  Bottom Layer w0.6: D4.5 53.669,8 57.869,3.8 73.337,3.8 75.937,6.4 84.7,6.4 86.3,8 D5.2
NetD4_6: D4.6 D5.1 | length 38.5
  Bottom Layer w0.6: D4.6 53.5,6.4 57,2.9 73.569,2.9 76.269,5.6 85.59,5.6 86.39,6.4 D5.1
NetD6_1: D6.1 D7.6 | length 35.6
  Bottom Layer w0.6: D7.6 D6.1
NetD6_2: D6.2 D7.5 | length 35.6
  Bottom Layer w0.6: D7.5 D6.2
NetD6_3: D6.3 D7.4 | length 35.6
  Bottom Layer w0.6: D7.4 D6.3
NetJ3_1: J3.1 SW1.3 | length 22.6
  Top Layer w0.6: J3.1 91.3,36.4 92.2,35.5 92.2,22 95.125,19.075 SW1.3
NetL1_2: L1.2 U4.4 | length 2.3
  Top Layer w0.6: U4.4 40,11.65 L1.2
NetQ1_1: Q1.1 R6.2 R19.2 | length 3.1
  Top Layer w0.2: Q1.1 13.1,26.075 R19.2 R6.2
NetQ2_1: Q2.1 R5.2 R15.2 | length 2.7
  Top Layer w0.2: Q2.1 32.625,18.8 R15.2 R5.2
NetQ2_3: Q2.3 R3.1 S1.2 | length 14.2
  Top Layer w0.2: S1.2 27.9,10 29.9,12 R3.1 29.9,19.625 Q2.3
NetQ3_1: Q3.1 R13.2 R20.2 | length 3
  Top Layer w0.2: Q3.1 13.1,18.4 R20.2 R13.2
NetQ4_1: Q4.1 R14.2 R21.2 | length 3
  Top Layer w0.2: Q4.1 13.325,11 R21.2 R14.2
OLED_D/C: P2.6 U1.6 | length 53.2
  Top Layer w0.2: U1.6 40.65,37.25 v1(41,36.9) ; v1(46.9,34.7) 46.977,34.623 47.194,34.623 47.217,34.6 83.5,34.6 84.3,35.4 84.3,37.336 83.176,38.46 P2.6
  Bottom Layer w0.2: v1(41,36.9) 41.857,36.043 41.857,35.812 42.635,35.034 46.566,35.034 v1(46.9,34.7)
OLED_RST: P2.5 U1.5 | length 48.2
  Top Layer w0.2: U1.5 41.25,37.75 v1(41.8,37.2) ; v1(47.9,35.4) 48,35.5 73.8,35.5 74.22,35.92 P2.5
  Bottom Layer w0.2: v1(41.8,37.2) 42.257,36.743 42.257,35.977 42.801,35.434 46.732,35.434 46.766,35.4 v1(47.9,35.4)
PIEZO: R5.1 TP6.1 U1.13 | length 14.1
  Top Layer w0.2: R5.1 35.3,28.85 37.75,31.3 U1.13
SENSOR_RX+: J2.3 R8.2 U5.5 | length 21.6
  Top Layer w0.2: U5.5 79.805,44.695 R8.2 85.975,44.5 86.675,43.8 92.3,43.8 93.7,45.2 93.7,46.583 93.197,47.086 92.659,47.086 J2.3
SENSOR_RX-: J2.6 R8.1 U5.6 | length 26.4
  Top Layer w0.2: U5.6 79.935,45.965 R8.1 85.141,45.9 86.741,44.3 92.092,44.3 93.1,45.308 v1(93.1,46.1) ; J2.6 89.11,51.478 91.153,49.435 92.007,49.435 93.668,47.774 v1(93.668,47.715)
  Bottom Layer w0.2: v1(93.1,46.1) 93.7,46.7 93.7,47.747 v1(93.668,47.715)
SENSOR_TX+: J2.1 R7.2 U5.8 | length 16.1
  Top Layer w0.2: U5.8 79.905,48.505 R7.2 88.178,48.6 88.753,48.025 89.607,48.025 91.65,45.982 J2.1
SENSOR_TX-: J2.2 R7.1 U5.7 | length 12.2
  Top Layer w0.2: U5.7 79.965,47.235 80.03,47.3 81.1,47.3 81.575,46.825 J2.2
SPI1_MISO: U1.16
SPI1_MOSI: P2.4 U1.17 | length 46.1
  Top Layer w0.2: U1.17 39.75,34.157 40.393,34.8 v1(40.4,34.8) ; v1(46,33.4) 46.2,33.2 82.82,33.2 P2.4
  Bottom Layer w0.2: v1(40.4,34.8) 42.5,32.7 43.6,32.7 43.61,32.69 44.7,32.69 45.4,33.39 45.99,33.39 v1(46,33.4)
SPI1_NSS: P2.7 U1.14 | length 49.9
  Top Layer w0.2: U1.14 38.25,34.65 39.8,36.2 42.6,36.2 v1(42.857,36.457) ; v1(47,36) 72.9,36 78,41.1 82.9,41.1 P2.7
  Bottom Layer w0.2: v1(42.857,36.457) 42.8,36.4 42.8,36 v1(47,36)
SPI1_SCK: P2.3 U1.15 | length 48.2
  Top Layer w0.2: U1.15 38.75,34.35 39.971,35.571 41.321,35.571 41.438,35.454 v1(41.438,35.382) ; v1(44.452,33.29) 44.452,33.248 46.86,30.84 P2.3
  Bottom Layer w0.2: v1(41.438,35.382) 43.53,33.29 v1(44.452,33.29)
SWCLK: J1.4 U1.37 | length 10.1
  Top Layer w0.2: U1.37 43.25,42.65 43.7,43.1 48.9,43.1 49.47,43.67 J1.4
SWDIO: J1.2 U1.34 | length 11.7
  Top Layer w0.2: U1.34 48.65,38.75 50.6,40.7 50.6,45.41 J1.2
USART1_RX: TP1.1 U1.31 U5.2 | length 32.1
  Top Layer w0.2: U1.31 57.05,37.25 67.035,47.235 TP1.1@69.3,47.235 ; TP1.1@69.3,47.2 69.4,47.3 72.385,47.3 U5.2
USART1_TX: TP2.1 U1.30 U5.3 | length 31.7
  Top Layer w0.2: U1.30 58.05,36.75 67.265,45.965 U5.3
VFB: R9.1 R10.2 U4.1 | length 3.8
  Top Layer w0.2: R9.1 R10.2 ; 41.3,8.3 41.3,9.4 41.65,9.75 U4.1
VPIEZO: C5.2 D5.4 D5.5 D5.6 D6.4 D6.5 D6.6 R3.2 R9.2 S1.1 TP5.1 U4.5 | length 295.5
  Top Layer w0.2: S1.1 30.825,10.075 30.825,17.125 R3.2
  Top Layer w0.6: v1(6.7,65.8) 5.4,65.8 2,62.4 2,8 v1(6.5,3.5) 25.4,3.5 29.489,7.589 30.693,8.793 30.693,9.943 S1.1 30.994,10 31.694,9.3 TP5.1 C5.2 39.349,9.3 39.75,9.701 39.75,9.75 U4.5 ; R9.2 U4.5@39.7,9.601
  Bottom Layer w0.6: v1(6.5,3.5) 7.9,2.1 73.9,2.1 76.3,4.5 91.6,4.5 92.2,5.1 D5.6 D5.5 ; v1(6.7,65.8) 91.6,65.8 92.3,65.1 92.3,60.5 D6.6 ; D5.4 92.3,9.5 D5.5@92.3,7.9
pads on no net: J1.6 J1.7 J1.8 J2.9 J2.10 J2.11 J2.12 J2.POS1 J2.POS2 J3.MNT SW1.1 SW1.MH1 SW1.MH2 U1.2 U1.3 U1.4 U1.12 U1.19 U1.20 U1.21 U1.22 U1.25 U1.26 U1.27 U1.28 U1.29 U1.32 U1.33 U1.35 U1.36 U1.38 U1.39 U1.42 U1.43 U1.45 U1.46

## Polygon pours and split planes (outlines as drawn)
GND on Top Layer "GND_L01_P000" (solid, remove dead copper, pour order 0): 100,70 100,0 0,0 0,70
GND on Bottom Layer "GND_L02_P001" (solid, remove dead copper, pour order 1): 100,70 100,0 0,0 0,70

## Silkscreen, mask and mechanical layers (free items; w line width, h text height)
Mechanical 1:
  the board outline again, w0.1
Dimensions:
  lines w0.5: 14,13 14,56 86,56 86,13 14,13

## Dimensions
0,70 to 0,0 on Dimensions
0,0 to 100,0 on Dimensions